# EAGLE board schematic (EAGLE 9.4.2)

Size 80 x 200 mm. Coordinates in mm from the lower left corner, seen from the top.
Outline: 0,0 80,0 80,200 0,200 0,0
Copper layers (1*16): Top 0.035mm / dielectric 1.5mm / Bottom 0.035mm
Design rules "default": minimum track width 6mil, minimum drill 0.35mm, track to track 6mil, track to pad 6mil, pad to pad 6mil, via to via 6mil, smd to smd 6mil, copper to edge 40mil, drill to drill 6mil, minimum pad ring 10mil, minimum via ring 8mil, stop-mask expansion 4mil, vias tented up to drill 0mil, thermal gap 10mil

## Footprints (pad centres in the part's own frame; a part is rotated, then mirrored left to right if it is on the bottom)
1X02 = drill 1.016 long: 1 -1.27,0; 2 1.27,0
LED5MM = drill 0.813 octagon: A -1.27,0; K 1.27,0
AXIAL-0.3 = drill 0.9 pad 1.88: P$1 -3.81,0; P$2 3.81,0

## Placement (x,y rotation side)
9VBAT  [1X02]  71.12,107.95 270 top
LED_  5mm  [LED5MM]  17.78,154.94 0 top
LED_1  5mm  [LED5MM]  41.91,154.94 0 top
LED_2  5mm  [LED5MM]  63.5,154.94 0 top
R1  330  [AXIAL-0.3]  8.89,110.49 270 top

## Library data of the parts
9VBAT = CASE-Pinhead
LED_ LED_1 LED_2 = CASE-LED
R1 = SparkFun-Resistors; PROD_ID: RES-12182

## Nets
9V: 9VBAT.2 R1.P$2
GND: 9VBAT.1 LED_2.K
N$1: LED_.A R1.P$1
N$2: LED_1.A LED_.K
N$3: LED_1.K LED_2.A

## Tracks (layer width: path | path; a pad name or v marks a point on that pad's centre or on a via)
9V  (1 unrouted)
GND  (1 unrouted)
N$1  (1 unrouted)
N$2  (1 unrouted)
N$3  (1 unrouted)

## Text on the board
tPlace: C A S E